# EAGLE board bk-cir7 (EAGLE 9.1.0)
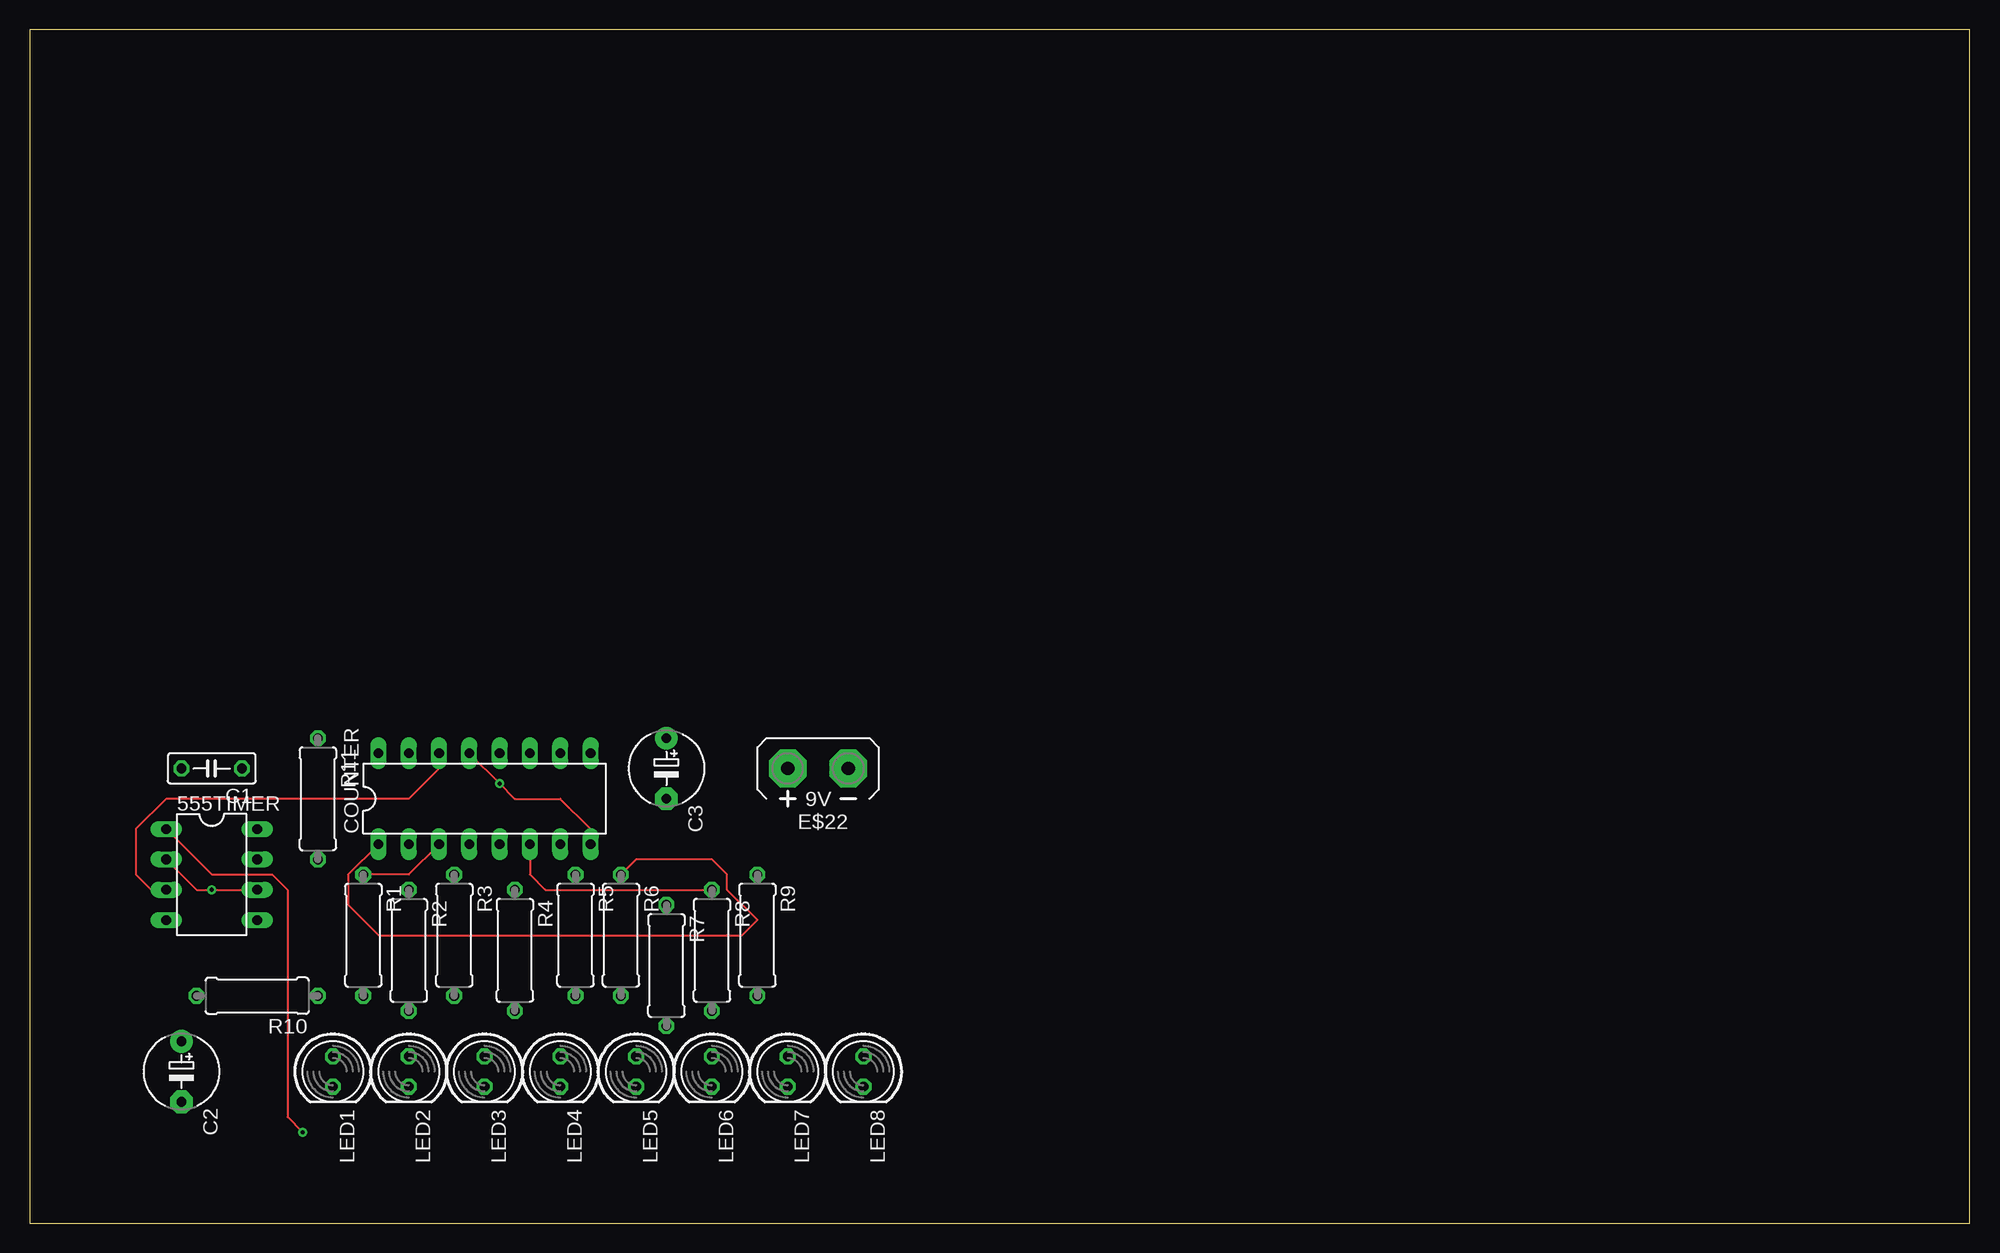
[diagram p0: board, top side]
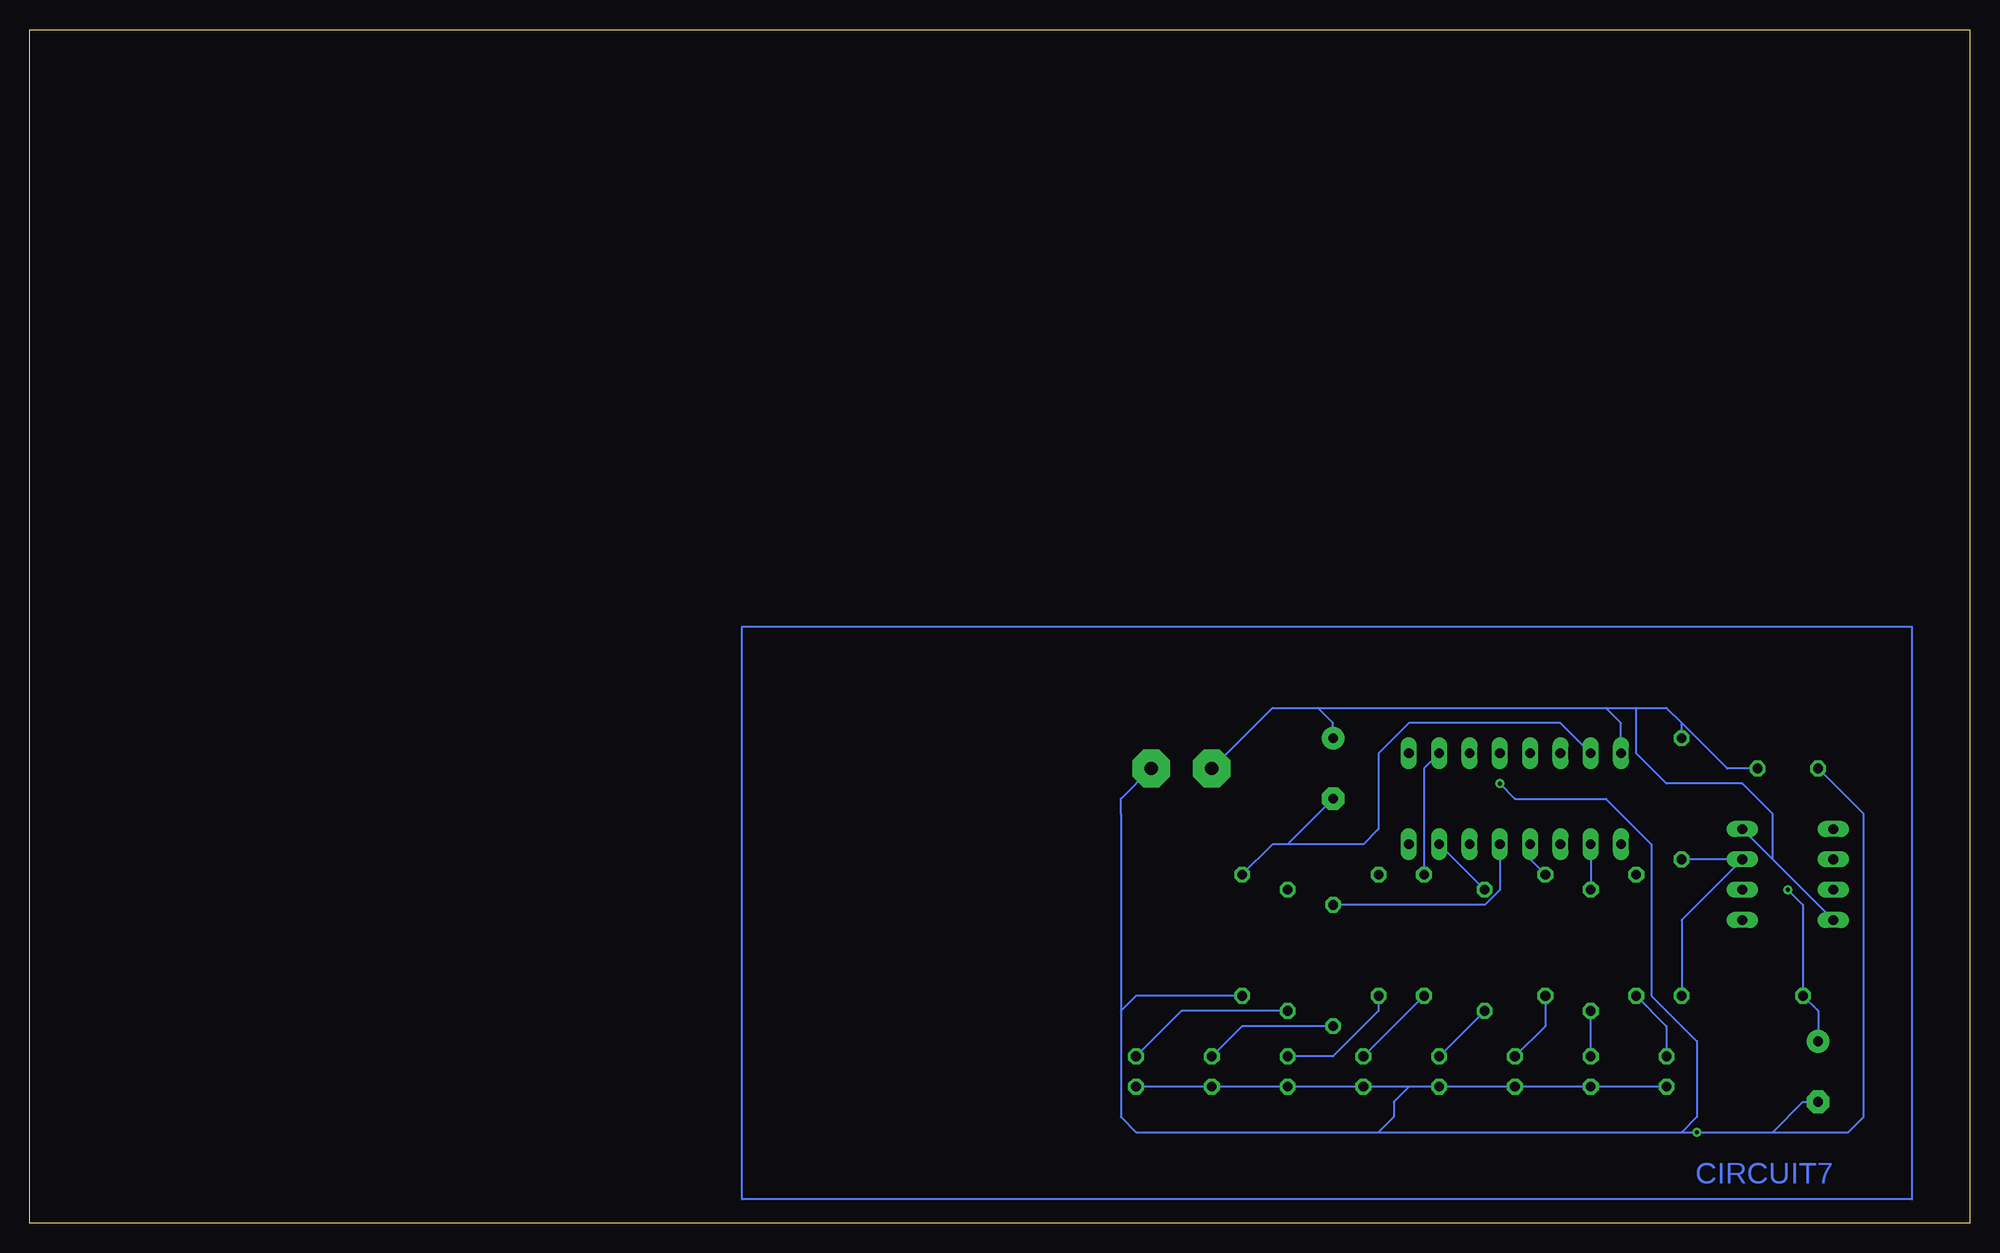
[diagram p1: board, bottom side, seen from below]

Size 162.54 x 100 mm. Coordinates in mm from the lower left corner, seen from the top.
Outline: 0,0 162.54,0 162.54,100 0,100 0,0
Copper layers (1*16): Top 0.035mm / dielectric 1.5mm / Bottom 0.035mm
Design rules "default": minimum track width 6mil, minimum drill 0.35mm, track to track 6mil, track to pad 6mil, pad to pad 6mil, via to via 6mil, smd to smd 6mil, copper to edge 40mil, drill to drill 6mil, minimum pad ring 10mil, minimum via ring 8mil, stop-mask expansion 4mil, vias tented up to drill 0mil, thermal gap 10mil

## Footprints (pad centres in the part's own frame; a part is rotated, then mirrored left to right if it is on the bottom)
DIL08 = drill 0.813 long: 1 -3.81,-3.81; 2 -1.27,-3.81; 3 1.27,-3.81; 4 3.81,-3.81; 5 3.81,3.81; 6 1.27,3.81; 7 -1.27,3.81; 8 -3.81,3.81
C050-025X075 = drill 0.813 octagon: 1 -2.54,0; 2 2.54,0
E5-6 = drill 0.813 pad 1.905: + -2.54,0 | drill 0.813 pad 1.905 octagon: - 2.54,0
DIL16 = drill 0.813 long: 1 -8.89,-3.81; 2 -6.35,-3.81; 3 -3.81,-3.81; 4 -1.27,-3.81; 5 1.27,-3.81; 6 3.81,-3.81; 7 6.35,-3.81; 8 8.89,-3.81; 9 8.89,3.81; 10 6.35,3.81; 11 3.81,3.81; 12 1.27,3.81; 13 -1.27,3.81; 14 -3.81,3.81; 15 -6.35,3.81; 16 -8.89,3.81
AB9V = drill 1.118 pad 3.15 octagon: + 0,2.54; - 0,-2.54
LED5MM = drill 0.813 octagon: A -1.27,0; K 1.27,0
0309/10 = drill 0.813 octagon: 1 -5.08,0; 2 5.08,0

## Placement (x,y rotation side)
555TIMER  [DIL08]  15.24,29.21 270 top
C1  [C050-025X075]  15.24,38.1 180 top
C2  .01uF  [E5-6]  12.7,12.7 270 top
C3  1uF  [E5-6]  53.34,38.1 270 top
COUNTER  [DIL16]  38.1,35.56 0 top
E$22  [AB9V]  66.04,38.1 90 top
LED1  [LED5MM]  25.4,12.7 270 top
LED2  [LED5MM]  31.75,12.7 270 top
LED3  [LED5MM]  38.1,12.7 270 top
LED4  [LED5MM]  44.45,12.7 270 top
LED5  [LED5MM]  50.8,12.7 270 top
LED6  [LED5MM]  57.15,12.7 270 top
LED7  [LED5MM]  63.5,12.7 270 top
LED8  [LED5MM]  69.85,12.7 270 top
R1  560  [0309/10]  27.94,24.13 270 top
R2  560  [0309/10]  31.75,22.86 270 top
R3  560  [0309/10]  35.56,24.13 270 top
R4  560  [0309/10]  40.64,22.86 270 top
R5  560  [0309/10]  45.72,24.13 270 top
R6  560  [0309/10]  49.53,24.13 270 top
R7  560  [0309/10]  53.34,21.59 270 top
R8  560  [0309/10]  57.15,22.86 270 top
R9  22K  [0309/10]  60.96,24.13 270 top
R10  180K  [0309/10]  19.05,19.05 180 top
R11  2.2K  [0309/10]  24.13,35.56 270 top

## Library data of the parts
555TIMER COUNTER = ic-package
C1-C3 R1-R11 = resistor
E$22 = battery
LED1-LED8 = led

## Nets
S$1: COUNTER.3 R1.1
S$2: COUNTER.2 R2.1
S$3: COUNTER.4 R3.1
S$4: COUNTER.7 R4.1
S$5: COUNTER.10 R5.1
S$6: COUNTER.1 R6.1
S$7: COUNTER.5 R7.1
S$8: LED6.A R6.2
S$9: 555TIMER.1 C1.2 C2.- COUNTER.8 COUNTER.13 E$22.- LED1.K LED2.K LED3.K LED4.K LED5.K LED6.K LED7.K LED8.K R9.2
S$11: 555TIMER.7 R10.1 R11.2
S$12: 555TIMER.2 555TIMER.6 C2.+ R10.2
S$13: LED1.A R1.2
S$14: LED2.A R2.2
S$15: LED3.A R3.2
S$16: LED4.A R4.2
S$17: LED5.A R5.2
S$19: LED7.A R7.2
S$20: LED8.A R8.2
S$21: COUNTER.6 R8.1
S$24: 555TIMER.3 COUNTER.14
S$25: C3.- COUNTER.15 R9.1
S$26: 555TIMER.4 555TIMER.8 C1.1 C3.+ COUNTER.16 E$22.+ R11.1

## Tracks (layer width: path | path; a pad name or v marks a point on that pad's centre or on a via)
S$1
  Top 0.152: COUNTER.3 31.75,29.21 R1.1
S$2
  Bottom 0.152: COUNTER.2 R2.1
S$3
  Bottom 0.152: R3.1 36.83,30.48 COUNTER.4
S$4
  Bottom 0.152: COUNTER.7 R4.1
S$5
  Bottom 0.152: COUNTER.10 45.72,38.1 R5.1
S$6
  Top 0.152: COUNTER.1 26.67,29.21 26.67,26.67 29.21,24.13 58.42,24.13 59.69,24.13 60.96,25.4 58.42,27.94 58.42,29.21 57.15,30.48 50.8,30.48 R6.1
S$7
  Bottom 0.152: COUNTER.5 39.37,27.94 40.64,26.67 R7.1
S$8
  Bottom 0.152: R6.2 49.53,17.78 53.34,13.97 LED6.A
S$9  (via drill 0.35)
  Top 0.152: COUNTER.13 v39.37,36.83 40.64,35.56 44.45,35.56 46.99,33.02 COUNTER.8 | 555TIMER.1 15.24,29.21 20.32,29.21 21.59,27.94 21.59,8.89 v22.86,7.62
  Bottom 0.152: v39.37,36.83 38.1,35.56 30.48,35.56 26.67,31.75 26.67,19.05 22.86,15.24 22.86,8.89 24.13,7.62 | LED8.K LED7.K LED6.K LED5.K 46.99,11.43 | 46.99,11.43 LED4.K LED3.K LED2.K LED1.K | 46.99,11.43 48.26,10.16 48.26,8.89 49.53,7.62 | 71.12,17.78 71.12,34.29 71.12,35.56 E$22.- | 71.12,17.78 71.12,8.89 69.85,7.62 49.53,7.62 | 49.53,7.62 24.13,7.62 | 24.13,7.62 v22.86,7.62 16.51,7.62 | 16.51,7.62 10.16,7.62 8.89,8.89 8.89,34.29 C1.2 | C2.- 13.97,10.16 16.51,7.62 | R9.2 69.85,19.05 71.12,17.78
S$10
  Bottom 0.152: 4.85,1.98 102.85,1.98 102.85,49.98 4.85,49.98 4.85,1.98
S$11
  Bottom 0.152: R11.2 555TIMER.7 24.13,25.4 R10.1
S$12  (via drill 0.35)
  Top 0.152: 555TIMER.2 13.97,27.94 v15.24,27.94 555TIMER.6
  Bottom 0.152: C2.+ 12.7,17.78 R10.2 13.97,26.67 v15.24,27.94
S$13
  Bottom 0.152: LED1.A 25.4,16.51 R1.2
S$14
  Bottom 0.152: LED2.A R2.2
S$15
  Bottom 0.152: R3.2 35.56,16.51 LED3.A
S$16
  Bottom 0.152: R4.2 LED4.A
S$17
  Bottom 0.152: R5.2 LED5.A
S$19
  Bottom 0.152: LED7.A 60.96,16.51 R7.2
S$20
  Bottom 0.152: LED8.A 66.04,17.78 R8.2
S$21
  Top 0.152: COUNTER.6 41.91,29.21 43.18,27.94 R8.1
S$24
  Top 0.152: COUNTER.14 34.29,38.1 31.75,35.56 11.43,35.56 8.89,33.02 8.89,29.21 10.16,27.94 555TIMER.3
S$25
  Bottom 0.152: COUNTER.15 34.29,41.91 46.99,41.91 49.53,39.37 49.53,33.02 50.8,31.75 57.15,31.75 | R9.1 58.42,31.75 57.15,31.75 | C3.- 57.15,31.75
S$26
  Bottom 0.152: 16.51,30.48 555TIMER.8 | 16.51,30.48 16.51,34.29 19.05,36.83 25.4,36.83 27.94,39.37 27.94,43.18 | 555TIMER.4 16.51,30.48 | R11.1 24.13,41.91 | 24.13,41.91 20.32,38.1 C1.1 | E$22.+ 58.42,43.18 54.61,43.18 | 54.61,43.18 30.48,43.18 | 30.48,43.18 27.94,43.18 | 27.94,43.18 25.4,43.18 24.13,41.91 | C3.+ 53.34,41.91 54.61,43.18 | COUNTER.16 29.21,41.91 30.48,43.18

## Text on the board
Bottom: CIRCUIT7